# EAGLE board Copy-paste fiducial tab (EAGLE 7.3.0)

Size 6.35 x 92.71 mm. Coordinates in mm from the lower left corner, seen from the top.
Outline: 6.35,72.39 6.35,0 0,0 0,22.86
Outline: 0,20.32 0,92.71 6.35,92.71 6.35,69.85
Copper layers (1*16): Top 0.0356mm / dielectric 1.5011mm / Bottom 0.0356mm
Design rules "default": minimum track width 8mil, minimum drill 20mil, track to track 8mil, track to pad 8mil, pad to pad 8mil, via to via 8mil, smd to smd 8mil, copper to edge 10mil, drill to drill 8mil, minimum pad ring 12mil, minimum via ring 10mil, stop-mask expansion 4mil, vias tented up to drill 20mil, thermal gap 10mil

## Footprints (pad centres in the part's own frame; a part is rotated, then mirrored left to right if it is on the bottom)
FIDUCIAL-1X2 = smd 1 x 1: 1 0,0

## Placement (x,y rotation side)
E$1  [FIDUCIAL-1X2]  3.17,3.81 0 top
E$2  [FIDUCIAL-1X2]  3.17,88.9 180 top

## Library data of the parts
E$1 E$2 = SparkFun-Aesthetics

## Text on the board
Dimension: Updated 10-30-13. Wider tab
tValues: Copy and paste into panel for fiducial tabs